# EAGLE board untitled (EAGLE 7.2.0)
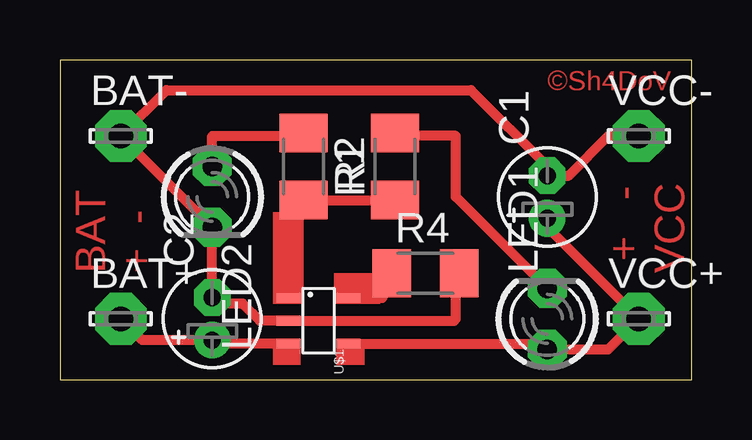
[diagram p0: board, top side]

Size 26.34 x 13.32 mm. Coordinates in mm from the lower left corner, seen from the top.
Outline: 0,0 26.34,0 26.34,13.32 0,13.32 0,0
Copper layers (1*16): Top 0.035mm / dielectric 1.5mm / Bottom 0.035mm
Design rules "my v1 *": minimum track width 20mil, minimum drill 24mil, track to track 16mil, track to pad 16mil, pad to pad 8mil, via to via 8mil, smd to smd 8mil, copper to edge 20mil, drill to drill 8mil, minimum pad ring 16mil, minimum via ring 8mil, stop-mask expansion 4mil, vias tented up to drill 0mil, thermal gap 10mil

## Footprints (pad centres in the part's own frame; a part is rotated, then mirrored left to right if it is on the bottom)
LSP10 = drill 1.016 pad 2.159 octagon: MP 0,0
E1,8-4 = drill 0.711 pad 1.168: + -0.889,0 | drill 0.711 pad 1.168 octagon: - 0.889,0
LED3MM = drill 0.813 octagon: A -1.27,0; K 1.27,0
M1206 = smd 1.6 x 2: 1 -1.4,0; 2 1.4,0
5PIN_SOT23 = smd 0.4 x 1: P$1 0.4,-0.63; P$2 1.35,-0.63; P$3 2.3,-0.63; P$4 2.3,1.87; P$5 0.4,1.87

## Placement (x,y rotation side)
BAT+  LSP10  [LSP10]  2.54,2.54 0 top
BAT-  LSP10  [LSP10]  2.54,10.16 0 top
C1  10u  [E1,8-4]  20.32,7.62 90 top
C2  10u  [E1,8-4]  6.35,2.54 90 top
LED1  red  [LED3MM]  20.32,2.54 90 top
LED2  green  [LED3MM]  6.35,7.62 270 top
R1  1k  [M1206]  13.97,8.89 90 top
R2  1k  [M1206]  10.16,8.89 270 top
R4  2k  [M1206]  15.24,4.45 0 top
U$1  mcp73831  [5PIN_SOT23]  10.16,3.81 270 top
VCC+  LSP10  [LSP10]  24.13,2.54 0 top
VCC-  LSP10  [LSP10]  24.13,10.16 0 top

## Library data of the parts
BAT+ BAT- VCC+ VCC- = solpad
C1 C2 = rcl
LED1 LED2 = led
R1 R2 R4 = resistor
U$1 = mcp73831

## Nets
GND: BAT-.MP C1.- C2.- LED2.K R4.2 U$1.P$2 VCC-.MP
N$1: R4.1 U$1.P$5
N$2: LED1.K R1.2
N$3: R1.1 R2.2 U$1.P$1
N$4: LED2.A R2.1
N$5: BAT+.MP C2.+ U$1.P$3
VCC: C1.+ LED1.A U$1.P$4 VCC+.MP

## Tracks (layer width: path | path; a pad name or v marks a point on that pad's centre or on a via)
GND  (1 unrouted)
  Top 0.406: R4.2 16.51,3.68 16.51,2.54 16.43,2.46 U$1.P$2 8.34,2.46 7.62,3.17 6.6,3.17 C2.- LED2.K BAT-.MP 4.45,12.06 17.14,12.06 20.32,8.89 | C1.- 21.21,8.51 22.86,10.16 VCC-.MP
N$1
  Top 0.406: U$1.P$5 13.44,3.41 R4.1
N$2
  Top 0.406: LED1.K 16.51,7.62 16.51,10.16 14.1,10.16 R1.2
N$3
  Top 0.406: U$1.P$1 9.53,6.86 R2.2 R1.1
N$4
  Top 0.406: LED2.A 6.35,10.16 10.03,10.16 R2.1
N$5
  Top 0.406: U$1.P$3 6.49,1.51 C2.+ 3.43,1.65 BAT+.MP
VCC
  Top 0.406: U$1.P$4 20.08,1.51 LED1.A 22.86,1.27 VCC+.MP 20.32,6.35 C1.+
(copper drawn outside any net)
  shapes: Top area x4

## Text on the board
Top: ©Sh4DoV | BAT / + - | + - / VCC